# Altium PCB PCB.PcbDoc
Units mm, origin at the board's own origin, x right, y up, seen from the top; angles counter-clockwise.
Board outline 95.76 x 94.11 mm, 2 copper layers (Top Layer, Bottom Layer); 66 components, 57 nets, 327 pads, 35 vias.
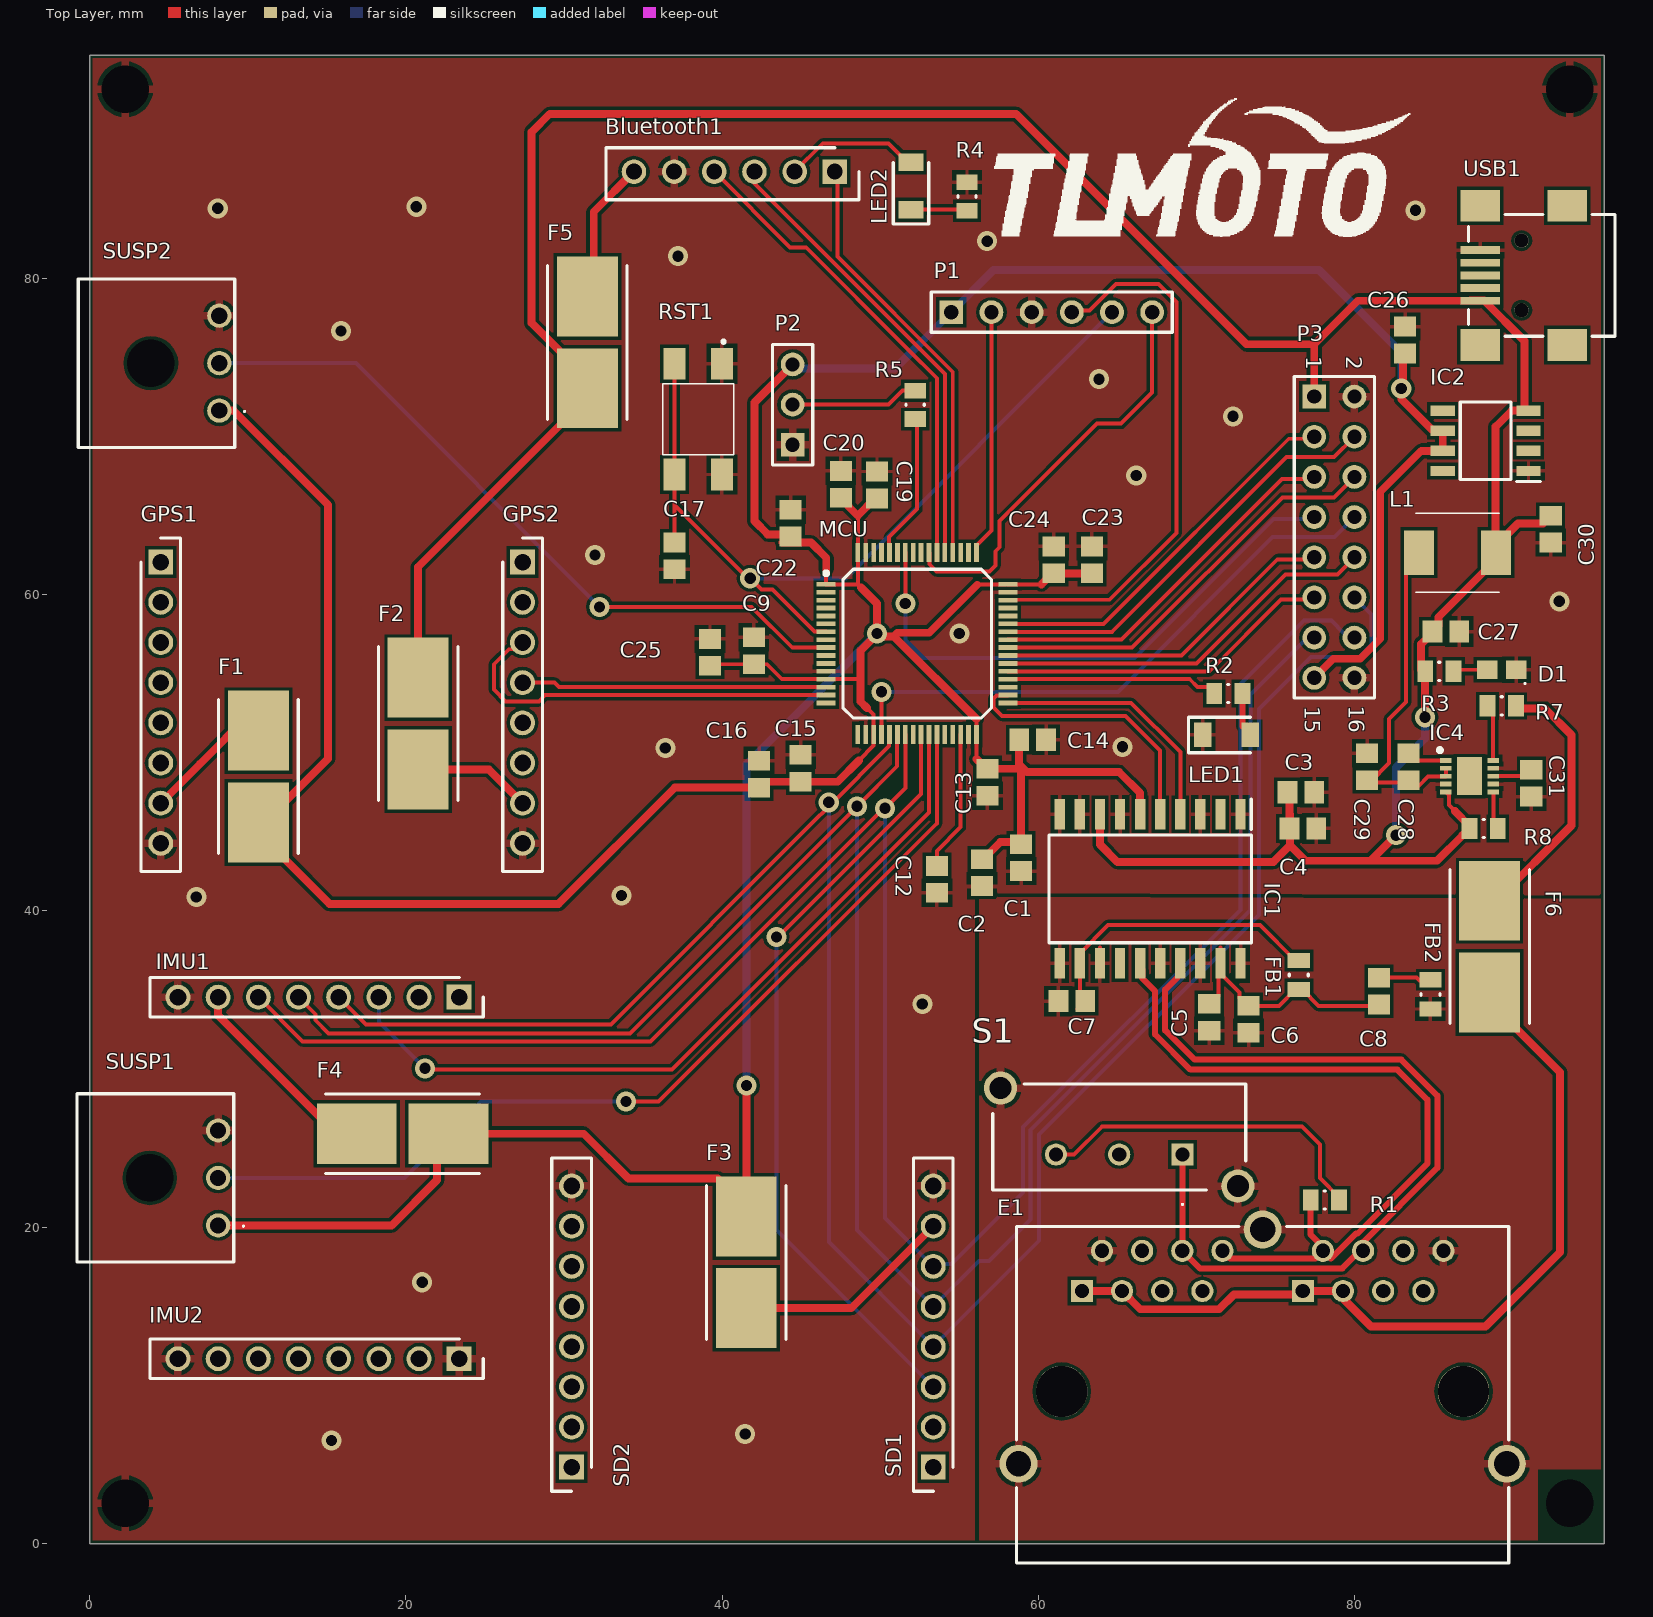
[diagram p0: Top Layer view]
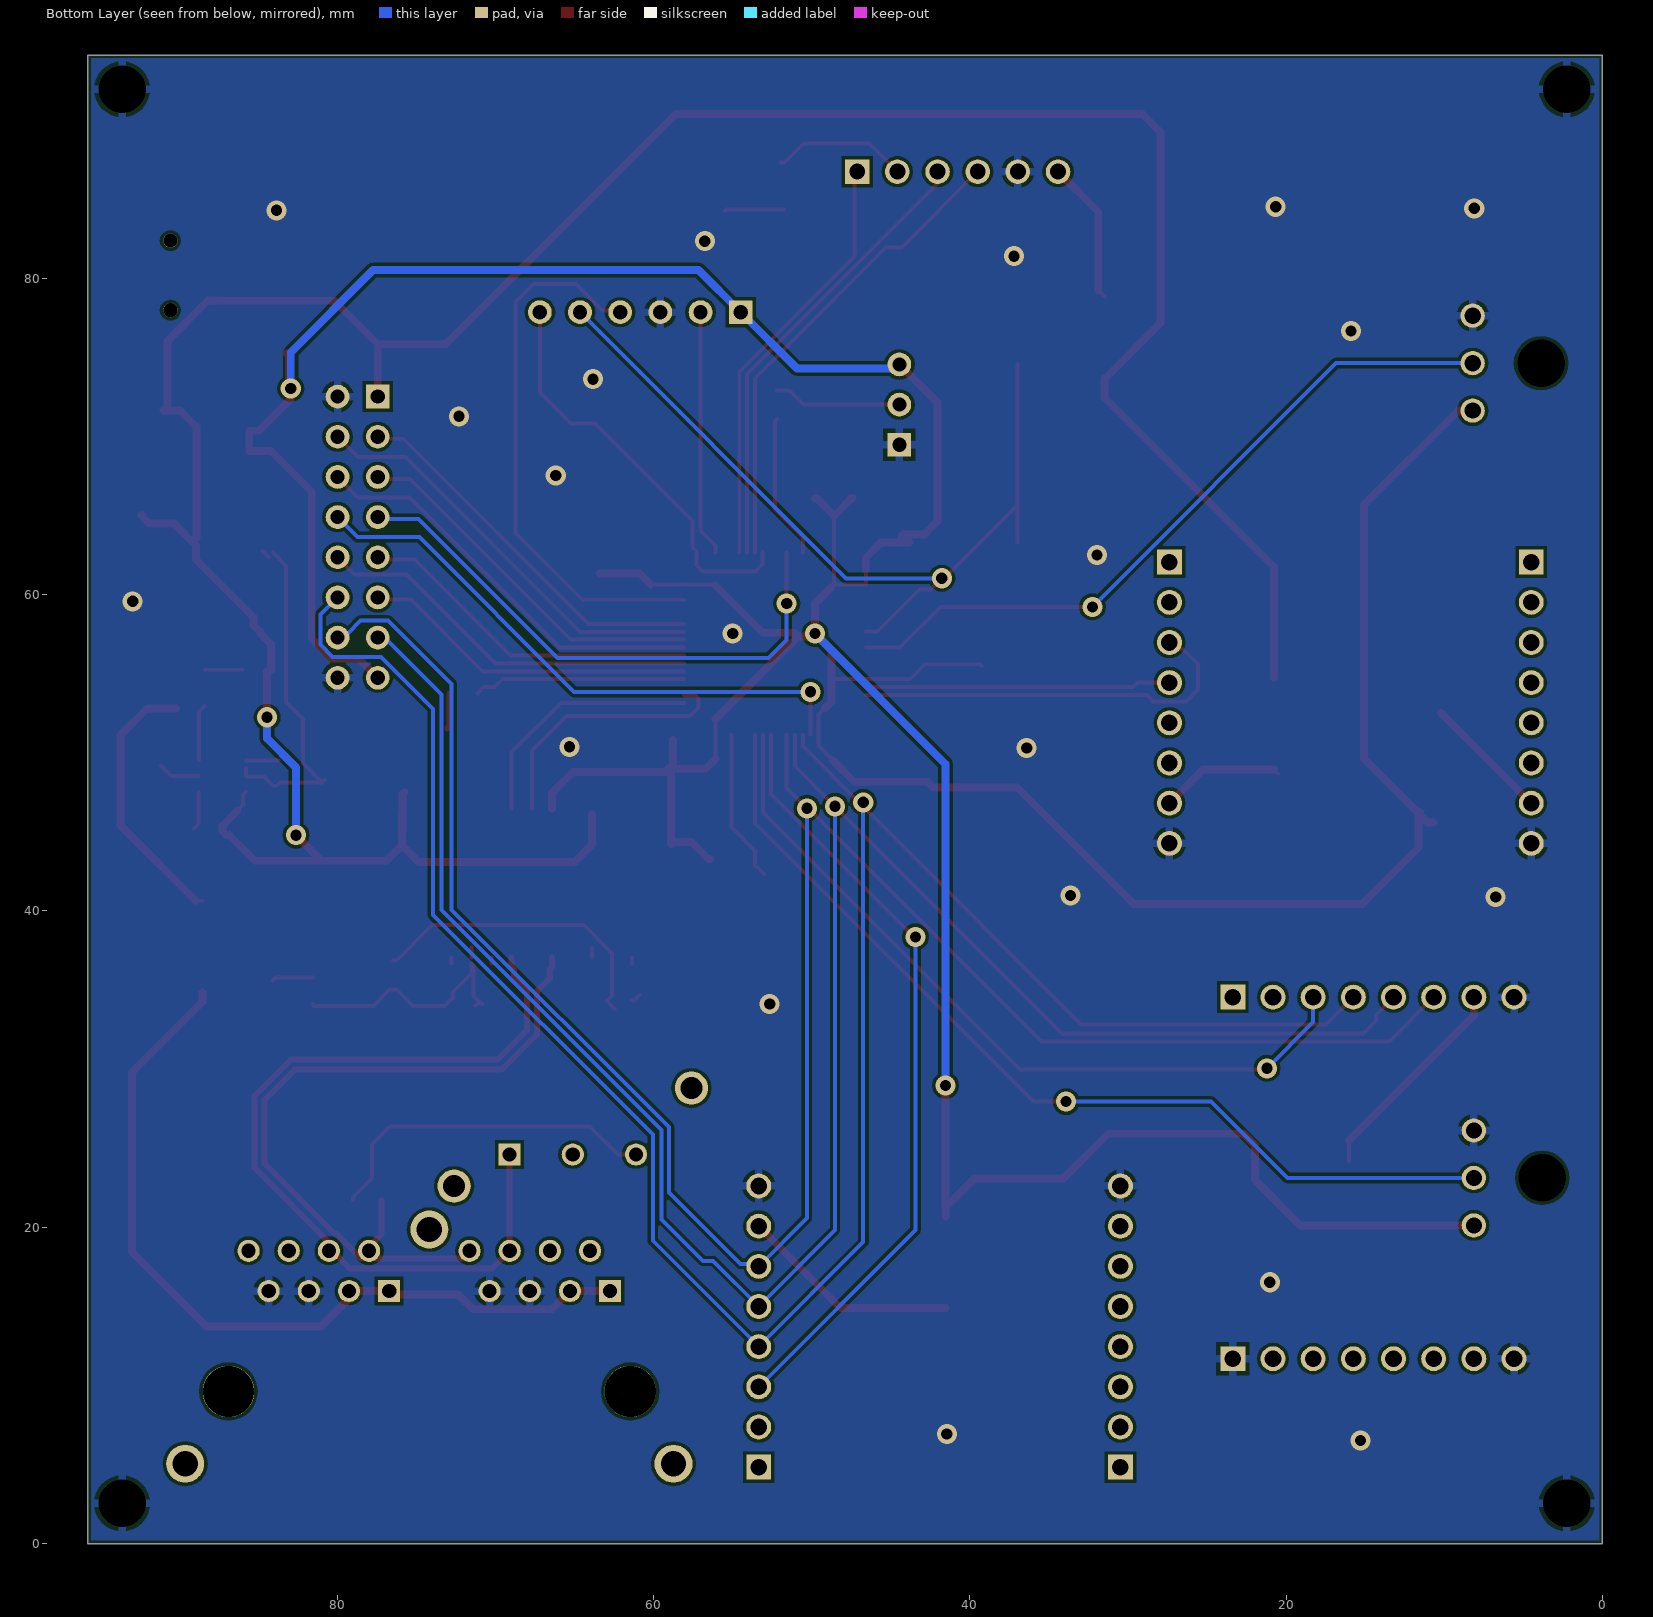
[diagram p1: Bottom Layer view, seen from below]

## Layer stack, top to bottom
Top Solder: solder mask 0.0102, Solder Resist, Dk 3.5
Top Layer: signal copper 0.0356
Dielectric 1: dielectric 0.32, FR-4, Dk 4.8
Bottom Layer: signal copper 0.0356
Bottom Solder: solder mask 0.0102, Solder Resist, Dk 3.5

## Board outline
95.758,0.006 95.758,94.113 0,94.113 0,0.006

## Design rules (kind name [scope] priority, off if disabled: settings)
BoardOutlineClearance [All] p1: gap=0.2 ignorepadtopadclearanceinfootprint=FALSE except(0.4: Arc-SplitBarrior Arc-SplitContinuation Track-SplitBarrior Track-SplitContinuation SMDPad-SplitBarrior SMDPad-SplitContinuation THPad-SplitBarrior THPad-SplitContinuation Via-SplitBarrior Via-SplitContinuation Fill-SplitBarrior Fill-SplitContinuation Poly-SplitBarrior Poly-SplitContinuation Region-SplitBarrior Region-SplitContinuation Text-SplitBarrior Text-SplitContinuation)
Clearance "Clearance Bottom Layer" [OnLayer('Bottom Layer')] p1: gap=0.203 ignorepadtopadclearanceinfootprint=TRUE except(0.254: Arc-Text Track-Text SMDPad-Text THPad-Text Via-Text Fill-Text Poly-Text Region-Text Text-Text)
Clearance "Clearance Top Layer" [OnLayer('Top Layer')] p2: gap=0.203 ignorepadtopadclearanceinfootprint=TRUE except(0.196: Arc-SMDPad Track-SMDPad; 0.254: Arc-Text Track-Text SMDPad-Text THPad-Text Via-Text Fill-Text Poly-Text Region-Text Text-Text)
Clearance [All] p3: gap=0.2 ignorepadtopadclearanceinfootprint=FALSE except(0.089: Arc-Arc Arc-Track Arc-SMDPad Track-Track Track-SMDPad SMDPad-SMDPad; 0.127: Arc-Via Track-Via SMDPad-Via THPad-Via Via-Via; 0.254: Arc-Text Track-Text SMDPad-Text THPad-Text Via-Text Fill-Text Poly-Text Region-Text Text-Text)
DiffPairsRouting [All] p1: maxlimit=0.254 minlimit=0.254 mostfreqgap=0.254 toplayer_minwidth=0.25 toplayer_maxwidth=0.381 toplayer_prefwidth=0.381 bottomlayer_minwidth=0.25 bottomlayer_maxwidth=0.381 bottomlayer_prefwidth=0.381 maxuncoupledlength=12.7
HoleSize [All] p1: absolutevalues=TRUE maxlimit=6.3 minlimit=0.2 maxpercent=80.000 minpercent=20.000
MinimumAnnularRing [All] p1: minimumring=0.076
MinimumSolderMaskSliver [All] p1: minsoldermaskwidth=0.1
PolygonConnect PolygonConnect_1 [All] p1: thpad.connectstyle=Relief thpad.reliefconductorwidth=0.508 thpad.reliefentries=4 thpad.polygonreliefangle="90 Angle" thpad.airgapwidth=0.254 smdpad.connectstyle=Relief smdpad.reliefconductorwidth=0.25 smdpad.reliefentries=4 smdpad.polygonreliefangle="90 Angle" smdpad.airgapwidth=0.254 via.connectstyle=Direct via.reliefconductorwidth=0.508 via.reliefentries=4 via.polygonreliefangle="90 Angle" via.airgapwidth=0.254
RoutingCorners [All] p1: cornerstyle=Round minsetback=2.54 maxsetback=2.54
RoutingVias [All] p1: holewidth=0.5 width=1 viastyle="Through Hole" minholewidth=0.2 minwidth=0.45 maxholewidth=1 maxwidth=2
SilkToSilkClearance [All] p1: silktosilkclearance=0.1
SilkToSolderMaskClearance [IsPad] p1: minsilkscreentomaskgap=0.1 clearancetoexposedcopper=TRUE
SolderMaskExpansion [All] p1: expansion=0.102
Width [All] p1: maxlimit=2.54 minlimit=0.089 preferedwidth=0.25 minimp=50.000000 maximp=50.000000 favimp=50.000000
24 further rules are at their usual default settings.

## Classes and differential pairs
component class "Supply_ (1)": C26 C27 C28 C29 C30 C31 D1 F6 IC2 IC4 R3 R7 R8
component class "MCU (2)": C9 C12 C13 C14 C15 C16 C17 C19 C20 C22 C23 C24 C25 LED1 MCU P1 P2 P3 R2 R5 RST1
component class Componentes: Bluetooth1 F2 F3 F4 F5 GPS1 GPS2 IMU1 IMU2 R4 SD1 SUSP1 SUSP2
component class CAN: C1 C2 C3 C4 C5 C6 C7 C8 FB1 FB2 IC1 R1
differential pair CAN: +CAN_P -CAN_N

## Components (designator, comment, footprint, x,y, rotation, side; value= is the part's Value field where it differs from the comment)
Bluetooth1 "61300611821" RHDR6W97P0X254_1X6_1574X250X865P 47.117,86.747 r180 top
C1 "10nF,+3.3V" "C 0805" 58.9,43.375 r90 top
C2 "100nF,+3.3V" "C 0805" 56.425,42.425 r90 top
C3 "100nF,+5V" "C 0805" 76.581,47.504 r180 top
C4 "10uF, +5V" "C 0805" 76.708,45.218 r180 top
C5 "10nF,+5V" "C 0805" 70.792,33.28 r90 top
C6 "100nF,+5V" "C 0805" 73.279,33.153 r90 top
C7 "100nF,+5V" "C 0805" 62.103,34.296 r0 top
C8 "10uF, +5V" "C 0805" 81.534,34.931 r270 top
C9 "Cap" "C 0805" 42,56.45 r90 top value=10nF
C12 "4.7uF" "C 0805" 53.575,42 r90 top
C13 "Cap" "C 0805" 56.769,48.139 r90 top value=1uF
C14 "Cap" "C 0805" 59.625,50.825 r180 top value=10nF
C15 "Cap" "C 0805" 44.958,49.02 r270 top value=1uF
C16 "Cap" "C 0805" 42.329,48.647 r270 top value=10nF
C17 "06035C104JAT2A" "C 0805" 36.981,62.45 r90 top
C19 "Cap" "C 0805" 47.498,66.974 r270 top value=10nF
C20 "Cap" "C 0805" 49.784,66.935 r270 top value=1uF
C22 "Cap" "C 0805" 44.323,64.522 r270 top value=1uF
C23 "Cap" "C 0805" 60.96,62.197 r270 top value=1uF
C24 "Cap" "C 0805" 63.373,62.202 r270 top value=10nF
C25 "Cap" "C 0805" 39.225,56.35 r90 top value=1uF
C26 "10uF" "C 0805" 83.175,76.1 r270 top
C27 "100nF, 25V" "C 0805" 85.749,57.664 r180 top
C28 "0.1uF, 25V" "C 0805" 83.387,49.116 r90 top
C29 "4.7pF, 25V" "C 0805" 80.772,49.116 r270 top
C30 "10uF,25V" "C 0805" 92.381,64.141 r270 top
C31 "2.2pF, 25V" "C 0805" 91.154,48.08 r90 top
D1 "Valor" "LED 0805" 89.281,55.251 r180 top
E1 "615016137621" Ethernet2 74.168,9.404 r0 top
F1 "015401.5DR" "Fuse Holder" 10.7,48.5 r90 top
F2 "015401.5DR" "Fuse Holder" 20.75,51.85 r270 top
F3 "015401.5DR" "Fuse Holder" 41.493,17.786 r270 top
F4 "015401.5DR" "Fuse Holder" 19.791,25.939 r180 top
F5 "015401.5DR" "Fuse Holder" 31.496,75.952 r90 top
F6 "015401.5DRT" "Fuse Holder" 88.494,37.746 r270 top
FB1 "1800Ohm, 1A" "F 0805" 76.454,35.947 r270 top
FB2 "1800Ohm, 1A" "F 0805" 84.775,34.725 r90 top
GPS1 "5-535541-6" RHDR8W60P0X254_1X8_2082X250X850P 4.5,62.055 r270 top
GPS2 "5-535541-6" RHDR8W60P0X254_1X8_2082X250X850P 27.375,62.055 r270 top
IC1 "ADM3053BRWZ" SOIC127P1032X265-20N 67.056,41.395 r270 top
IC2 "LD1117D33TR" SOIC127P600X175-8N 88.265,69.729 r180 top
IC4 "MAX16903SATB50_V+T" SON50P300X300X80-11N 87.249,48.52 r0 top
IMU1 "5-535541-6" RHDR8W60P0X254_1X8_2082X250X850P 23.368,34.55 r180 top
IMU2 "5-535541-6" RHDR8W60P0X254_1X8_2082X250X850P 23.368,11.69 r180 top
L1 "4.7uH" MPX1D0530L150 86.487,62.652 r180 top
LED1 "150120GS75000" LEDC3214X78N 71.882,51.127 r0 top
LED2 "150120GS75000" LEDC3214X78N 51.934,85.833 r90 top
MCU "STM32F446RET7" "Pins 1.2mm" 52.324,56.902 r0 top (schematic designator IC3)
P1 "Header 6" HDR1X6 54.483,77.857 r0 top
P2 "Header 3" HDR1X3 44.45,69.475 r90 top
P3 "Header 8X2" HDR2X8 77.431,72.523 r270 top
R1 "120R,+5V" "R 0805" 78.105,21.723 r0 top
R2 "LED3.3V" "R 0805" 72.003,53.754 r180 top
R3 "1k" "R 0805" 85.344,55.152 r0 top
R4 "LED3.3V" "R 0805" 55.475,85.175 r270 top
R5 "10K" "R 0805" 52.197,71.995 r90 top
R7 "33k" "R 0805" 89.281,52.965 r180 top
R8 "20k" "R 0805" 88.138,45.218 r0 top
RST1 "430181038816" 430181038816 38.481,71.095 r270 top
S1 "MSS1300R04" MHS12304 69.1,24.6 r0 top
SD1 "5-535541-6" RHDR8W60P0X254_1X8_2082X250X850P 53.34,4.832 r90 top
SD2 "5-535541-6" RHDR8W60P0X254_1X8_2082X250X850P 30.475,4.832 r90 top
SUSP1 "66200311022" 66200311022 8.13,20.12 r270 top
SUSP2 "66200311022" 66200311022 8.2,71.634 r270 top
USB1 "WE-Communication Connectors 651005136421" 65100516121 90.54,77.984 r90 top

## Footprints (in the part's own frame and the unit in brackets; to place one, negate y for a bottom-side part, rotate by r counter-clockwise, add the part's x,y. Pads: shape width x height; smd on the part's side, far side on the other; paste and mask are expansions set on the pad)
65100516121 [mm]
  rect 0.5x2.5 smd: 1(0.6,2.6) 2(1.4,2.6) 3(2.2,2.6) 4(3,2.6) 5(3.8,2.6)
  rect 2x2.5 smd: ""(-2.2,-2.9) ""(-2.2,2.6) ""(6.6,-2.9) ""(6.6,2.6)
  round 0.9 hole 0.9 unplated: ""(0,0) ""(4.4,0)
  silkscreen extent -1.65,-5.9 6.05,3.35, body extent -2.6,-5.9 7,3.35, height 3.92
66200311022 [mm]
  round 1.53 hole 1.02: 1(0,0) 2(-3,0) 3(-6,0)
  round 1.5 hole 3 unplated: MH1(-3,-4.32)
  silkscreen extent -8.32,-8.92 2.32,1.65, body extent -8.32,-8.92 2.32,0.98, height 5.82
430181038816 [mm]
  rect 2x1.4 smd: 1(-3.5,1.5) 2(3.5,1.5) 3(-3.5,-1.5) 4(3.5,-1.5)
  silkscreen extent -5,-2.25 2.25,2.25
"C 0805" [mm] "Chip Capacitor, 2-Leads, Body 2,00x1,25mm, IPC Medium Density"
  rect 1.25x1.4 smd: 1(-0.85,0) 2(0.85,0)
  body extent -1.08,-0.67 1.07,0.67, height 0.9
Ethernet2 [mm]
  rect 1.4x1.4 hole 0.9: A1(-11.43,6.565) B1(2.54,6.565)
  round 1.4 hole 0.9: A2(-10.16,9.105) A3(-8.89,6.565) A4(-7.62,9.105) A5(-6.35,6.565) A6(-5.08,9.105) A7(-3.81,6.565) A8(-2.54,9.105) B2(3.81,9.105) B3(5.08,6.565) B4(6.35,9.105) B5(7.62,6.565) B6(8.89,9.105) B7(10.16,6.565) B8(11.43,9.105)
  round 3.25 hole 3.25 unplated: MH1(-12.7,0.215) MH2(12.7,0.215)
  round 2.4 hole 1.6: S1(-15.435,-4.355) S2(15.435,-4.355) S3(0,10.455)
  silkscreen extent -15.56,-10.64 15.56,10.63, body extent -15.57,-10.64 15.56,10.63, height 13.75
"F 0805" [mm] "Chip Resistor, 2-Leads, Body 2,00x1,25mm, IPC Medium Density"
  rect 0.95x1.4 smd: 1(-0.925,0) 2(0.925,0)
  silkscreen extent -0.05,-0.6 0.05,0.6, body extent -1.05,-0.7 1.05,0.7, height 0.55
"Fuse Holder" [mm]
  rect 5.05x3.85 smd: 1(-2.9,0.025) 2(2.9,0.025)
  silkscreen extent -4.86,-2.49 4.87,2.54, body extent -4.86,-2.51 4.87,2.52, height 3.82
HDR1X3 [mm] "Connector; Header; 3 Position"
  rect 1.5x1.5 hole 0.9: 1(0,0)
  round 1.5 hole 0.9: 2(2.54,0) 3(5.08,0)
  silkscreen extent -1.27,-1.27 6.35,1.27
HDR1X6 [mm] "Connector; Header; 6 Position"
  rect 1.5x1.5 hole 0.9: 1(0,0)
  round 1.5 hole 0.9: 2(2.54,0) 3(5.08,0) 4(7.62,0) 5(10.16,0) 6(12.7,0)
  silkscreen extent -1.27,-1.27 13.97,1.27
HDR2X8 [mm] "Connector; Header; 8x2 Position"
  rect 1.5x1.5 hole 0.9: 1(0,0)
  round 1.5 hole 0.9: 2(0,2.54) 3(2.54,0) 4(2.54,2.54) 5(5.08,0) 6(5.08,2.54) 7(7.62,0) 8(7.62,2.54) 9(10.16,0) 10(10.16,2.54) 11(12.7,0) 12(12.7,2.54) 13(15.24,0) 14(15.24,2.54) 15(17.78,0) 16(17.78,2.54)
  silkscreen extent -1.27,-1.27 19.05,3.81
"LED 0805" [mm] "Molded Diode, 2-Leads, Body 2,00x1,25mm, IPC Medium Density"
  rect 1.3x1.15 smd: 1(-0.925,0) 2(0.925,0)
  silkscreen extent -1.52,0.83 -1.43,0.92, body extent -1.05,-0.67 1.05,0.67, height 1.1
LEDC3214X78N [mm]
  rect 1.1x1.55 smd: 1(-1.5,0) 2(1.5,0)
  silkscreen extent -2.4,-1.12 1.5,1.12, body extent -1.6,-0.8 1.6,0.8, height 0.68
MHS12304 [mm]
  rect 1.4x1.4 hole 0.9: 1(0,0)
  round 1.4 hole 0.9: 2(-4,0) 3(-8,0)
  round 2.1 hole 1.4: MH1(3.5,-2) MH2(-11.5,4.2)
  silkscreen extent -12,-3.2 4,4.45, body extent -12.1,-2.6 4.1,4.8, height 12.4
MPX1D0530L150 [mm]
  rect 1.905x2.79 smd: 1(-2.425,0) 2(2.425,0)
  silkscreen extent -2.65,-2.5 2.65,2.5, body extent -3.19,-2.5 3.19,2.5, height 3.1
"Pins 1.2mm" [mm] "CQFP, 64-Leads, Body 12,00x12,00mm, Pitch 0,50mm, IPC Medium Density"
  rect 1.2x0.3 smd: 1(-5.75,3.75) 2(-5.75,3.25) 3(-5.75,2.75) 4(-5.75,2.25) 5(-5.75,1.75) 6(-5.75,1.25) 7(-5.75,0.75) 8(-5.75,0.25) 9(-5.75,-0.25) 10(-5.75,-0.75) 11(-5.75,-1.25) 12(-5.75,-1.75) 13(-5.75,-2.25) 14(-5.75,-2.75) 15(-5.75,-3.25) 16(-5.75,-3.75) 33(5.75,-3.75) 34(5.75,-3.25) 35(5.75,-2.75) 36(5.75,-2.25) 37(5.75,-1.75) 38(5.75,-1.25) 39(5.75,-0.75) 40(5.75,-0.25) 41(5.75,0.25) 42(5.75,0.75) 43(5.75,1.25) 44(5.75,1.75) 45(5.75,2.25) 46(5.75,2.75) 47(5.75,3.25) 48(5.75,3.75)
  rect 0.3x1.2 smd: 17(-3.75,-5.75) 18(-3.25,-5.75) 19(-2.75,-5.75) 20(-2.25,-5.75) 21(-1.75,-5.75) 22(-1.25,-5.75) 23(-0.75,-5.75) 24(-0.25,-5.75) 25(0.25,-5.75) 26(0.75,-5.75) 27(1.25,-5.75) 28(1.75,-5.75) 29(2.25,-5.75) 30(2.75,-5.75) 31(3.25,-5.75) 32(3.75,-5.75) 49(3.75,5.75) 50(3.25,5.75) 51(2.75,5.75) 52(2.25,5.75) 53(1.75,5.75) 54(1.25,5.75) 55(0.75,5.75) 56(0.25,5.75) 57(-0.25,5.75) 58(-0.75,5.75) 59(-1.25,5.75) 60(-1.75,5.75) 61(-2.25,5.75) 62(-2.75,5.75) 63(-3.25,5.75) 64(-3.75,5.75)
  silkscreen extent -5.87,-4.7 4.7,4.7, body extent -5,-5 5,5, height 1.6
"R 0805" [mm] "Chip Resistor, 2-Leads, Body 2,00x1,25mm, IPC Medium Density"
  rect 1x1.35 smd: 1(-0.9,0) 2(0.9,0)
  silkscreen extent -0.05,-0.58 0.05,0.58, body extent -1.05,-0.67 1.05,0.67, height 0.6
RHDR6W97P0X254_1X6_1574X250X865P [mm]
  rect 1.55x1.55 hole 1: 1(0,0)
  round 1.55 hole 1: 2(2.54,0) 3(5.08,0) 4(7.62,0) 5(10.16,0) 6(12.7,0)
  silkscreen extent -1.52,-1.51 14.47,1.78, body extent -1.52,-1.25 14.22,1.25, height 8.65
RHDR8W60P0X254_1X8_2082X250X850P [mm]
  rect 1.575x1.575 hole 1.05: 1(0,0)
  round 1.575 hole 1.05: 2(2.54,0) 3(5.08,0) 4(7.62,0) 5(10.16,0) 6(12.7,0) 7(15.24,0) 8(17.78,0)
  silkscreen extent -1.52,-1.25 19.55,1.25, body extent -1.52,-1.25 19.3,1.25, height 8.5
SOIC127P600X175-8N [mm]
  rect 1.525x0.65 smd: 1(-2.712,1.905) 2(-2.712,0.635) 3(-2.712,-0.635) 4(-2.712,-1.905) 5(2.712,-1.905) 6(2.712,-0.635) 7(2.712,0.635) 8(2.712,1.905)
  silkscreen extent -3.47,-2.45 1.6,2.58, body extent -3,-2.45 3,2.45, height 1.75
SOIC127P1032X265-20N [mm]
  rect 1.925x0.65 smd: 1(-4.712,5.715) 2(-4.712,4.445) 3(-4.712,3.175) 4(-4.712,1.905) 5(-4.712,0.635) 6(-4.712,-0.635) 7(-4.712,-1.905) 8(-4.712,-3.175) 9(-4.712,-4.445) 10(-4.712,-5.715) 11(4.712,-5.715) 12(4.712,-4.445) 13(4.712,-3.175) 14(4.712,-1.905) 15(4.712,-0.635) 16(4.712,0.635) 17(4.712,1.905) 18(4.712,3.175) 19(4.712,4.445) 20(4.712,5.715)
  silkscreen extent -5.68,-6.4 3.4,6.4, body extent -5.16,-6.4 5.16,6.4, height 2.65
SON50P300X300X80-11N [mm]
  rect 0.75x0.3 smd: 1(-1.5,1) 2(-1.5,0.5) 3(-1.5,0) 4(-1.5,-0.5) 5(-1.5,-1) 6(1.5,-1) 7(1.5,-0.5) 8(1.5,0) 9(1.5,0.5) 10(1.5,1)
  rect 1.6x2.4 smd: 11(0,0)
  silkscreen extent -2,1.53 -1.75,1.77, body extent -1.55,-1.5 1.55,1.5, height 0.8

## Part data
Bluetooth1: "Connector", Manufacturer_Name="Wurth Elektronik", Mouser Part Number=710-61300611821, Datasheet Link=https://www.we-online.de/katalog/datasheet/61300611821.pdf, Height=8.65mm, Manufacturer_Part_Number=61300611821, Mouser Price/Stock=https://www.mouser.co.uk/ProductDetail/Wurth-Elektronik/61300611821?qs=iLbezkQI%252BsgS21jF2eozhA%3D%3D
C1 C5: library part 885012207126_6, "WCAP-CSGP Multilayer Ceramic Chip Capacitor, General Purpose, size 0805, X7R, 47nF, 100V", Capacitance=47nF, Capacitance Tolerance=+/-10%, Isolation Resistance=>=2.1GOhm, Manufacturer="Wurth Elektronik", Manufacturer Part Number=885012207126, Operating Temperature="-55 to +125degC", Rated Voltage=100VDC, Ceramic Type=X7R, ComponentLink1Description=Manufacturer, ComponentLink1URL=http://www.we-online.de, ComponentLink2Description=Datasheet, ComponentLink2URL=https://www.we-online.com/catalog/datasheet/885012207126.pdf, Dissipation Factor=#NAME?, Height=1.25mm, Mounting Technology=SMT, Packaging="Tape and Reel", Published Date="May 2020", Size=0805, Technical Reference=X7R0805473K100DFCT10000
C2: library part 885012208015_1, "WCAP-CSGP General Purpose Ceramic Capacitors, size 1206, 2.2uF, +/-10%, 10VDC", Capacitance=2.2uF, Capacitance Tolerance=+/-10%, Isolation Resistance=>=0.2GOhm, Operating Temperature="-55 to +125degC", Part Number=885012208015, Rated Voltage=10VDC, Ceramic Type=X7R, ComponentLink1Description=Manufacturer, ComponentLink1URL=http://www.we-online.de, ComponentLink2Description=Datasheet, ComponentLink2URL=https://katalog.we-online.com/pbs/datasheet/885012208015.pdf, Dissipation Factor=#NAME?, Height="1.15mm +/-0.15mm", Mounting Technology=SMT, Packaging="Tape and Reel", Published Date="August 2019", Publisher="Wurth Elektronik", Size=1206, Technical Reference=X7R1206225K010DFCT10000
C3 C6 C7: library part 885012208013_4, "WCAP-CSGP General Purpose Ceramic Capacitors, size 1206, 1uF, +/-10%, 10VDC", Capacitance=1uF, Capacitance Tolerance=+/-10%, Isolation Resistance=>=0.5GOhm, Operating Temperature="-55 to +125degC", Part Number=885012208013, Rated Voltage=10VDC, Ceramic Type=X7R, ComponentLink1Description=Manufacturer, ComponentLink1URL=http://www.we-online.de, ComponentLink2Description=Datasheet, ComponentLink2URL=https://katalog.we-online.com/pbs/datasheet/885012208013.pdf, Dissipation Factor=#NAME?, Height="1.15mm +/-0.15mm", Mounting Technology=SMT, Packaging="Tape and Reel", Published Date="August 2019", Publisher="Wurth Elektronik", Size=1206, Technical Reference=X7R1206105K010DFCT10000
C4 C8: library part 885012208013_5, "WCAP-CSGP General Purpose Ceramic Capacitors, size 1206, 1uF, +/-10%, 10VDC", Capacitance=1uF, Capacitance Tolerance=+/-10%, Isolation Resistance=>=0.5GOhm, Operating Temperature="-55 to +125degC", Part Number=885012208013, Rated Voltage=10VDC, Ceramic Type=X7R, ComponentLink1Description=Manufacturer, ComponentLink1URL=http://www.we-online.de, ComponentLink2Description=Datasheet, ComponentLink2URL=https://katalog.we-online.com/pbs/datasheet/885012208013.pdf, Dissipation Factor=#NAME?, Height="1.15mm +/-0.15mm", Mounting Technology=SMT, Packaging="Tape and Reel", Published Date="August 2019", Publisher="Wurth Elektronik", Size=1206, Technical Reference=X7R1206105K010DFCT10000
C9 C13 C14 C15 C16 C19 C20 C22 C23 C24 C25: "Capacitor", LatestRevisionDate=17-Jul-2002, LatestRevisionNote="Re-released for DXP Platform.", PackageDescription="Radial Cap, Thru-Hole; 2 Leads; 0.3 in Pin Spacing", PackageReference=RAD-0.3, Published=8-Jun-2000, Publisher="Altium Limited"
C12: library part 885012208013, "WCAP-CSGP Multilayer Ceramic Chip Capacitor, General Purpose, size 1206, X7R, 1uF, 10V", Capacitance=1uF, Capacitance Tolerance=+/-10%, Isolation Resistance=>=0.5GOhm, Manufacturer="Wurth Elektronik", Operating Temperature="-55 to +125degC", Rated Voltage=10VDC, Ceramic Type=X7R, ComponentLink1Description=Manufacturer, ComponentLink1URL=http://www.we-online.de, ComponentLink2Description=Datasheet, ComponentLink2URL=https://www.we-online.com/catalog/datasheet/885012208013.pdf, Dissipation Factor=#NAME?, Height=1.15mm, Manufacturer Part Number=885012208013, Mounting Technology=SMT, Packaging="Tape and Reel", Published Date="May 2020", Size=1206, Technical Reference=X7R1206105K010DFCT10000
C17: "Capacitor,100nf,+3.3V,1206", Manufacturer_Name=AVX, Mouser Part Number=581-06035C104JAT2A, Arrow Part Number=06035C104JAT2A, Arrow Price/Stock=https://www.arrow.com/en/products/06035c104jat2a/avx, Datasheet Link=http://www.mouser.com/catalog/supplier/library/pdf/AVXSurfaceMountCeramic.pdf, Height=0.9mm, Manufacturer_Part_Number=06035C104JAT2A, Mouser Price/Stock=https://www.mouser.co.uk/ProductDetail/AVX/06035C104JAT2A/?qs=EbDiPP9peV%252BVb%2FIEcsjONQ%3D%3D
C26 C27 C28 C29 C30 C31: library part Condensador, "Condensador"
D1: library part LED, "LED"
E1: "WR-MJ Modular Jack THT Horizontal Shielded Dual Port 8P8C Tab Down", Contact Resistance=20mOhm, Insulation Resistance=500MOhm, Operating Temperature="-40 to +85degC", Rated Current=1.5A, Withstanding Voltage=1000VAC, Working Voltage=120VAC, ComponentLink1Description=Manufacturer, ComponentLink1URL=http://www.we-online.de, ComponentLink2Description=Datasheet, ComponentLink2URL=https://katalog.we-online.com/em/datasheet/615016137621.pdf, Mounting Technology=THT, Packaging=Tray, Part Number=615016137621, Published Date="November 2019", Publisher="Wurth Elektronik", Type=Horizontal, xPxC=8P8C
F1 F2 F3 F4 F5: "Fuse", Manufacturer_Name=LITTELFUSE, Mouser Part Number=576-015401.5DR, RS Part Number=7382879P, Allied_Number=70519132, Allied Price/Stock=https://www.alliedelec.com/littelfuse-015401-5dr/70519132/, Datasheet Link=https://www.littelfuse.com/~/media/electronics/datasheets/fuses/littelfuse_fuse_154_154t_154l_154tl_datasheet.pdf.pdf, Height=3.81mm, Manufacturer_Part_Number=015401.5DR, Mouser Price/Stock=https://www.mouser.com/Search/Refine.aspx?Keyword=576-015401.5DR, RS Price/Stock=http://uk.rs-online.com/web/p/products/7382879P
F6: "Fuse", Manufacturer_Name=LITTELFUSE, Mouser Part Number=576-015401.5DRT, Arrow Part Number=015401.5DRT, Arrow Price/Stock=https://www.arrow.com/en/products/015401.5drt/littelfuse?region=nac, Datasheet Link=https://componentsearchengine.com/Datasheets/2/015401.5DRT.pdf, Height=3.81mm, Manufacturer_Part_Number=015401.5DRT, Mouser Price/Stock=https://www.mouser.co.uk/ProductDetail/Littelfuse/015401.5DRT?qs=gu7KAQ731USSn8iq6YrVPw%3D%3D
FB1 FB2: library part 742792090, "WE-CBF SMT EMI Suppression Ferrite Bead, size 0805, 1800Ohm, 1A", DC Resistance max.=0.4Ohm, Manufacturer="Wurth Elektronik", Operating Temperature="-55 to +125degC", Rated Current=1A, ComponentLink1Description=Manufacturer, ComponentLink1URL=http://www.we-online.de, ComponentLink2Description=Datasheet, ComponentLink2URL=https://www.we-online.com/catalog/datasheet/742792090.pdf, Impedance @100MHz=1800Ohm, Impedance max.=2000Ohm, Manufacturer Part Number=742792090, Mounting Technology=SMT, Packaging="Tape and Reel", Published Date="March 2020", Size=0805, Type="Wide Band"
GPS1 GPS2 IMU1 IMU2 SD1 SD2: "Connector Socket Strip RCP 8 POS 2.54mm Solder ST Thru-Hole Gang of Tubes", Package=None, Availability=Unavailable, MF="TE Connectivity", MP=5-535541-6, Price=None, SnapEDA_Link=https://www.snapeda.com/parts/5-535541-6/TE%20Connectivity%20AMP%20Connectors/view-part/497141/?ref=snap
IC1: "Integrated Circuit", Manufacturer_Name="Analog Devices", Mouser Part Number=584-ADM3053BRWZ, Arrow Part Number=ADM3053BRWZ, Arrow Price/Stock=https://www.arrow.com/en/products/adm3053brwz/analog-devices?region=nac, Datasheet Link=https://componentsearchengine.com/Datasheets/2/ADM3053BRWZ.pdf, Height=2.65mm, Manufacturer_Part_Number=ADM3053BRWZ, Mouser Price/Stock=https://www.mouser.co.uk/ProductDetail/Analog-Devices/ADM3053BRWZ?qs=BpaRKvA4VqGZYG1hZ9cdqw%3D%3D
IC2: "Integrated Circuit", Manufacturer_Name=STMicroelectronics, Mouser Part Number=511-LD1117D33-TR, Arrow Part Number=LD1117D33TR, Arrow Price/Stock=https://www.arrow.com/en/products/ld1117d33tr/stmicroelectronics, Datasheet Link=http://www.st.com/st-web-ui/static/active/en/resource/technical/document/datasheet/CD00000544.pdf, Height=1.75mm, Manufacturer_Part_Number=LD1117D33TR, Mouser Price/Stock=https://www.mouser.co.uk/ProductDetail/STMicroelectronics/LD1117D33TR?qs=8YYpzd7qSxIl%2FiC6F%2FA2nA%3D%3D
IC4: "Integrated Circuit", Manufacturer_Name="Maxim Integrated", Manufacturer_Part_Number=MAX16903SATB50/V+T, Datasheet Link=https://pdfserv.maximintegrated.com/en/ds/MAX16903.pdf, Height=0.8mm
L1: library part Inductor, "Inductor"
LED1 LED2: "LED", Manufacturer_Name="Wurth Elektronik", Mouser Part Number=710-150120GS75000, Height=0.78mm, Manufacturer_Part_Number=150120GS75000, Mouser Price/Stock=https://www.mouser.co.uk/ProductDetail/Wurth-Elektronik/150120GS75000?qs=LlUlMxKIyB3I3AMxrmBw4A%3D%3D
MCU: "Integrated Circuit", Manufacturer_Name=STMicroelectronics, Mouser Part Number=511-STM32F446RET7, Arrow Part Number=STM32F446RET7, Arrow Price/Stock=https://www.arrow.com/en/products/stm32f446ret7/stmicroelectronics?region=nac, Datasheet Link=https://componentsearchengine.com/Datasheets/5/STM32F446RET7.pdf, Height=1.6mm, Manufacturer_Part_Number=STM32F446RET7, Mouser Price/Stock=https://www.mouser.co.uk/ProductDetail/STMicroelectronics/STM32F446RET7?qs=qzCNEk%252BRr%252BZ3vIhuSM4Ejg%3D%3D
P1: "Header, 6-Pin", LatestRevisionDate=17-Jul-2002, LatestRevisionNote="Re-released for DXP Platform.", Publisher="Altium Limited"
P2: "Header, 3-Pin", LatestRevisionDate=17-Jul-2002, LatestRevisionNote="Re-released for DXP Platform.", Publisher="Altium Limited"
P3: "Header, 8-Pin, Dual row", LatestRevisionDate=17-Jul-2002, LatestRevisionNote="Re-released for DXP Platform.", Publisher="Altium Limited"
R1: library part 560050320011_9, "WRIS-KSKE SMT Thick Film Resistor, size 0805, 1Ohm, 0.33W", Manufacturer="Wurth Elektronik", Manufacturer Part Number=560050320011, Operating Temperature="-55 to +155degC", Rated Current=0.57A, Rated Power=0.33W, Resistance=1Ohm, Resistance Tolerance=+/-1%, Temperature Coefficient of Resistance=+/-100ppm/degC, ComponentLink1Description=Manufacturer, ComponentLink1URL=http://www.we-online.de, ComponentLink2Description=Datasheet, ComponentLink2URL=https://www.we-online.com/catalog/datasheet/560050320011.pdf, Height=0.6mm, Length=2mm, Mounting Technology=SMT, Packaging="Tape and Reel", Published Date="May 2020", Size=0805, Technical Reference=KE08051R00F103KAATP0000, Width=1.25mm
R2 R5: library part 560050320011, "WRIS-KSKE SMT Thick Film Resistor, size 0805, 1Ohm, 0.33W", Manufacturer="Wurth Elektronik", Operating Temperature="-55 to +155degC", Rated Current=0.57A, Rated Power=0.33W, Resistance=1Ohm, Resistance Tolerance=+/-1%, Temperature Coefficient of Resistance=+/-100ppm/degC, ComponentLink1Description=Manufacturer, ComponentLink1URL=http://www.we-online.de, ComponentLink2Description=Datasheet, ComponentLink2URL=https://www.we-online.com/catalog/datasheet/560050320011.pdf, Height=0.6mm, Length=2mm, Manufacturer Part Number=560050320011, Mounting Technology=SMT, Packaging="Tape and Reel", Published Date="May 2020", Size=0805, Technical Reference=KE08051R00F103KAATP0000, Width=1.25mm
R3 R7 R8: library part Resistencia, "Resistencia"
R4: library part 560050320011_2, "WRIS-KSKE SMT Thick Film Resistor, size 0805, 1Ohm, 0.33W", Manufacturer="Wurth Elektronik", Manufacturer Part Number=560050320011, Operating Temperature="-55 to +155degC", Rated Current=0.57A, Rated Power=0.33W, Resistance=1Ohm, Resistance Tolerance=+/-1%, Temperature Coefficient of Resistance=+/-100ppm/degC, ComponentLink1Description=Manufacturer, ComponentLink1URL=http://www.we-online.de, ComponentLink2Description=Datasheet, ComponentLink2URL=https://www.we-online.com/catalog/datasheet/560050320011.pdf, Height=0.6mm, Length=2mm, Mounting Technology=SMT, Packaging="Tape and Reel", Published Date="May 2020", Size=0805, Technical Reference=KE08051R00F103KAATP0000, Width=1.25mm
RST1: "WS-TASV SMT Tact Switch 4.5x4.5mm, height 3.8mm, 160gf", Operating Temperature="-40 to +85degC", Rated Current=50mA, Rated Voltage=12VDC, ComponentLink1Description=Manufacturer, ComponentLink1URL=http://www.we-online.de, ComponentLink2Description=Datasheet, ComponentLink2URL=https://katalog.we-online.com/em/datasheet/430181038816.pdf, Contact Material="Stainless Steel", Contact Plating=Silver, Height=3.8mm, Mounting Technology=SMT, Operation Force=160gf, Packaging="Tape and Reel", Part Number=430181038816, Published Date="September 2019", Publisher="Wurth Elektronik", Terminal Material="Copper Alloy", Terminal Plating=Silver, Washable=No
S1: library part MHS12304, "Switch", Manufacturer_Name="TE Connectivity", Mouser Part Number=506-MHS12304, Datasheet Link=https://www.te.com/commerce/DocumentDelivery/DDEController?Action=showdoc&DocId=Customer+Drawing%7F1825255%7FB2%7Fpdf%7FEnglish%7FENG_CD_1825255_B2.pdf%7F1825255-5, Height=12.3mm, Manufacturer_Part_Number=MHS12304, Mouser Price/Stock=https://www.mouser.co.uk/ProductDetail/TE-Connectivity-PB/MHS12304?qs=x%2FgbKjZ2T%2FMAxqlZIkgJKQ%3D%3D
SUSP1 SUSP2: "Connector", Manufacturer_Name="Wurth Elektronik", Mouser Part Number=710-66200311022, Datasheet Link=https://docs.rs-online.com/3e1f/A700000007269589.pdf, Height=5.72mm, Manufacturer_Part_Number=66200311022, Mouser Price/Stock=https://www.mouser.co.uk/ProductDetail/Wurth-Elektronik/66200311022?qs=3RJ0PdSuLVkSi7ZZT4Z8xA%3D%3D
USB1: "WR-COM Mini USB Vertical TH Type B 5 Contacts", Manufacturer="Würth Elektronik eiSos GmbH", partNo=651005136421, ComponentLink1 Description=Manufacturer, ComponentLink1URL=http://www.we-online.de, ComponentLink2 Description=Datasheet, ComponentLink2URL=http://katalog.we-online.de/em/datasheet/651005136421.pdf, Created by="Karrer Zheng", Created Date=10/10/2014, NoPins=5

## Free pads (board coordinates)
  round 1.524 hole 3: 3(2.25,2.546) 3(2.25,91.95) 3(93.599,2.546) 3(93.599,91.95)

## Via types
v1: diameter 1.27, hole 0.711, Top Layer to Bottom Layer, 35 vias

## Nets (pads, with @x,y where several pads share a name; then routed paths per layer and width w, separated by ;. In a path a pad name is that pad's centre, name@x,y a point inside that pad or via, vN(x,y) a via of type N, cw(c..) or ccw(c..) an arc to the next point about the centre after c; other vN are vias at no path point)
+24V: E1.A1 E1.A3 E1.B1 E1.B3 F6.2 | length 52.4
  Top Layer w0.5: E1.A1 E1.A3 66.431,14.816 71.411,14.816 72.349,15.754 76.493,15.754 E1.B1 ; E1.B1@76.923,15.969 E1.B3 79.248,15.5 81.026,13.722 88.265,13.722 92.964,18.421 92.964,29.801 88.519,34.246 F6.2
B3_RX: Bluetooth1.3 MCU.53 | length 29.1
  Top Layer w0.25: Bluetooth1.3 42.037,85.985 54.074,73.948 MCU.53
B3_TX: Bluetooth1.4 MCU.54 | length 30.5
  Top Layer w0.25: Bluetooth1.4 44.294,81.95 45.31,81.95 51.689,75.571 51.689,75.568 53.574,73.683 MCU.54
"BOOT SEL": P2.2 R5.2 | length 7.9
  Top Layer w0.25: P2.2@44.704,72.015 50.498,72.015 51.387,72.904 52.188,72.904 R5.2
"CAN Rx": IC1.4 MCU.33 | length 15.7
  Top Layer w0.25: MCU.33 65.848,53.152 68.961,50.039 IC1.4@68.961,46.488
"CAN Tx": IC1.5 MCU.34 | length 16.9
  Top Layer w0.25: MCU.34 58.049,53.627 57.345,53.627 57.15,53.432 57.15,52.872 57.692,52.33 65.495,52.33 67.691,50.134 IC1.5@67.691,46.488
CAN_N: E1.A8 E1.B2 IC1.15 R1.1 | length 47.8
  Top Layer w0.381: IC1.15@66.421,37.064 IC1.15 66.421,36.427 66.556,36.292 66.556,35.749 67.373,34.931 67.373,32.191 69.6,29.965 82.681,29.965 84.582,28.064 84.582,27.901 84.576,27.895 84.576,26.169 84.582,26.163 84.582,24.018 80.167,19.603 80.065,19.603 78.502,18.04 78.447,18.04 E1.B2 ; E1.A8 72.097,18.04 77.509,18.04 E1.B2 ; R1.1 77.205,19.534 77.978,18.761 E1.B2
CAN_P: E1.A6 E1.B4 IC1.17 S1.1 | length 54.1
  Top Layer w0.381: IC1.17@68.961,37.064 IC1.17 68.961,36.427 68.826,36.292 68.826,35.84 68.008,35.022 68.008,32.454 69.863,30.6 82.944,30.6 85.217,28.327 85.217,27.638 85.211,27.632 85.211,26.432 85.217,26.426 85.217,23.755 80.518,19.056 E1.B4 80.313,18.509 79.209,17.405 70.192,17.405 E1.A6 69.088,24.588 S1.1
CANGND: C5.1 C6.1 C7.1 E1.A2 E1.B8 E1.S1 E1.S2 E1.S3 FB2.1 IC1.11 IC1.13 IC1.16 IC1.18 IC1.20 S1.MH1 S1.MH2 | length 2.5
  Top Layer w0.25: C7.1@60.872,34.677 C7.1 C7.1@61.341,34.384 ; IC1.11 IC1.11@61.341,37.064 ; 63.881,37.701 63.881,37.064 IC1.13@63.899,37.046 ; IC1.18 IC1.18@70.231,37.064 ; IC1.20 IC1.20@72.771,37.064
CS_IMU: IMU1.3 MCU.26 | length 49.5
  Top Layer w0.25: IMU1.3 IMU1.3@18.488,34.75 ; v1(21.209,30.05) 21.281,29.978 36.83,29.978 53.074,46.222 MCU.26
  Bottom Layer w0.25: IMU1.3 18.288,32.971 v1(21.209,30.05)
CS_SD: MCU.25 SD1.3 | length 49.2
  Top Layer w0.25: v1(43.434,38.36) 43.526,38.36 52.574,47.408 MCU.25
  Bottom Layer w0.25: v1(43.434,38.36) 43.434,19.818 SD1.3
Enable: Bluetooth1.1 MCU.52 | length 27.2
  Top Layer w0.25: Bluetooth1.1 47.275,86.589 47.275,81.388 54.574,74.089 MCU.52
GND: Bluetooth1.5 C1.1 C2.1 C3.1 C4.1 C9.2 C12.1 C13.1 C14.1 C15.1 C16.1 C17.1 C19.1 C20.1 C22.1 C23.1 C24.1 C25.2 C26.1 C27.1 C29.1 C30.2 C31.1 D1.1 E1.A5 E1.A7 E1.B5 E1.B7 GPS1.8 GPS2.8 IC1.1 IC1.3 IC1.7 IC1.9 IC1.10 IC2.1 IC4.4 IC4.7 IC4.9 IMU1.8 IMU2.1 IMU2.8 LED1.1 MCU.12 MCU.18 MCU.31 MCU.47 MCU.63 P1.3 P2.1 P3.2 P3.16 pad.3 R4.1 RST1.1 RST1.2 SD1.8 SD2.8 SUSP1.3 SUSP2.3 USB1.5
  other v1: 15.3,6.525 41.45,6.925 21.025,16.525 52.65,34.125 6.75,40.875 33.625,40.975 36.4,50.3 65.3,50.376 54.991,57.536 92.925,59.575 31.95,62.508 66.175,67.525 72.3,71.275 63.825,73.625 15.9,76.675 37.2,81.4 56.75,82.35 83.825,84.3 8.1,84.425 20.656,84.525
GPS_RX: GPS2.4 MCU.14 | length 19.3
  Top Layer w0.25: GPS2.4 29.391,54.435 29.674,54.152 MCU.14
GPS_TX: GPS2.3 MCU.15 | length 25.5
  Top Layer w0.25: GPS2.3 27.36,56.975 26.931,56.546 26.513,56.546 25.567,55.6 25.567,53.996 26.306,53.256 28.4,53.256 28.796,53.652 MCU.15
MISO: IMU1.5 MCU.22 P3.13 SD1.5 | length 134.5
  Top Layer w0.25: IMU1.5 14.287,33.471 14.287,33.09 15.113,32.264 34.163,32.264 v1(48.514,46.615) 51.049,49.15 51.049,51.127 MCU.22
  Bottom Layer w0.25: v1(48.514,46.615) 48.514,19.818 SD1.5 56.22,17.872 56.855,17.872 59.481,20.498 59.481,26.142 73.406,40.067 73.406,53.679 77.01,57.283 P3.13
MOSI: IMU1.6 MCU.23 P3.14 SD1.6 | length 137.1
  Top Layer w0.25: IMU1.6 13.462,31.756 35.468,31.756 50.2,46.488 v1(50.292,46.488) 51.574,47.77 MCU.23
  Bottom Layer w0.25: v1(50.292,46.488) 50.292,20.58 SD1.6 53.486,17.678 54.502,17.678 59.028,22.204 59.028,26.33 72.771,40.073 72.771,54.362 76.77,58.361 78.509,58.361 79.348,57.522 79.732,57.522 P3.14
NetBluetooth1_6: Bluetooth1.6 F5.2 | length 9.1
  Top Layer w0.25: F5.2 F5.2@31.877,79.258
  Top Layer w0.5: F5.2@31.877,79.258 31.877,84.207 Bluetooth1.6
NetC8_1: C8.1 FB2.2 | length 2.6
  Top Layer w0.25: C8.1 83.895,35.781 84.074,35.602
NetC12_2: C12.2 MCU.30 | length 9.7
  Top Layer w0.25: C12.2@53,42.35 53.5,42.85 C12.2 53.575,43.796 55.074,45.295 MCU.30
NetC28_1: C28.1 C29.2 IC4.2 IC4.3 L1.2 | length 22.1
  Top Layer w0.25: C29.2 C29.2@80.847,48.266 ; L1.2 83.235,61.825 83.235,53.21 82.169,52.144 82.169,49.344 80.95,48.125 83.603,48.125 83.812,47.916 84.041,47.916 84.637,48.512 85.741,48.512 IC4.3 IC4.2 ; L1.2@84.34,62.375 L1.2@84.728,62.763
NetC28_2: C28.2 IC4.1 | length 2
  Top Layer w0.25: C28.2@83.716,49.52 IC4.1
NetC31_2: C31.2 IC4.8 | length 2.7
  Top Layer w0.25: IC4.8 90.463,48.52 C31.2@91.059,49.116 ; C31.2@91.051,49.098 C31.2@91.139,49.186
NetD1_2: D1.2 R3.2 | length 2.4
  Top Layer w0.25: R3.2@85.979,55.251 D1.2
NetF1_2: F1.2 GPS1.7 | length 8.1
  Top Layer w0.5: GPS1.7 6.964,49.279 F1.2@10.205,52.52
NetF2_2: F2.2 GPS2.7 | length 7.8
  Top Layer w0.25: F2.2@20.521,48.696 F2.2
  Top Layer w0.5: F2.2 25.24,48.95 GPS2.7
NetF3_2: F3.2 SD1.7 | length 14
  Top Layer w0.5: F3.2 48.154,14.886 SD1.7
NetF4_2: F4.2 IMU1.7 | length 13.7
  Top Layer w0.25: F4.2@16.015,24.158 F4.2@16.015,25.501
  Top Layer w0.5: IMU1.7 8.128,33.387 F4.2@16.015,25.501
NetF6_1: F6.1 R7.1 | length 17.3
  Top Layer w0.25: F6.1 F6.1@88.946,40.646 ; R7.1@90.181,52.79 R7.1
  Top Layer w0.5: F6.1@88.946,40.646 93.7,45.4 93.7,51.125 92.035,52.79 R7.1@90.181,52.79
NetIC3_60: MCU.60 R5.1 | length 9.2
  Top Layer w0.25: MCU.60 50.549,62.677 50.549,63.636 52.324,65.411 52.324,70.968 R5.1
NetIC4_6: IC4.6 R8.2 | length 2.4
  Top Layer w0.25: IC4.6 88.774,47.495 88.774,45.482 R8.2
NetIC4_10: IC4.10 R7.2 | length 3.6
  Top Layer w0.25: R7.2 88.724,52.622 88.724,49.545 IC4.10
NetLED1_2: LED1.2 R2.1 | length 2.3
  Top Layer w0.381: R2.1 72.903,51.666 LED1.2@73.025,51.544
NetLED2_1: LED2.1 R4.2 | length 3.8
  Top Layer w0.25: LED2.1@51.759,84.358 55.392,84.358 R4.2
NetR1_2: R1.2 S1.3 | length 21.9
  Top Layer w0.25: S1.3 62.25,24.6 64.025,26.375 76.65,26.375 77.8,25.225 77.8,23.103 79.005,21.898 R1.2
NRST: C17.2 MCU.7 P1.5 RST1.3 RST1.4 | length 54.1
  Top Layer w0.25: C17.2 36.981,65.677 ; RST1.3 RST1.4 36.981,65.677 ; MCU.7 46.549,57.677 45.823,57.677 43.169,60.331 42.47,60.331 v1(41.767,61.034) 41.624,61.034 36.981,65.677
  Bottom Layer w0.25: v1(41.767,61.034) 47.82,61.034 P1.5
PA4: MCU.20 P3.8 | length 37.2
  Top Layer w0.25: MCU.20 v1(50.074,53.854)
  Bottom Layer w0.25: v1(50.074,53.854) 65.024,53.854 74.803,63.633 78.701,63.633 P3.8
PA8: MCU.41 P3.5 | length 23.6
  Top Layer w0.25: MCU.41 65.237,57.152 75.401,67.316 77.304,67.316 P3.5
PA9: MCU.42 P3.4 | length 27
  Top Layer w0.25: MCU.42 64.631,57.652 75.669,68.69 78.678,68.69 P3.4
PA10: MCU.43 P3.3 | length 24.3
  Top Layer w0.25: MCU.43 64.115,58.152 75.819,69.856 77.304,69.856 P3.3
PB6: MCU.58 P3.7 | length 35.5
  Top Layer w0.25: v1(51.574,59.442) MCU.58
  Bottom Layer w0.25: v1(51.574,59.442) 51.574,57.144 52.728,55.99 66.065,55.99 74.851,64.776 77.304,64.776 P3.7
PC6: MCU.37 P3.11 | length 21.3
  Top Layer w0.25: MCU.37 70.792,55.152 75.336,59.696 77.304,59.696 P3.11
PC7: MCU.38 P3.10 | length 24.7
  Top Layer w0.25: MCU.38 69.994,55.652 75.627,61.285 78.893,61.285 P3.10
PC8: MCU.39 P3.9 | length 21.9
  Top Layer w0.25: MCU.39 69.035,56.152 75.119,62.236 77.304,62.236 P3.9
PC9: MCU.40 P3.6 | length 26.4
  Top Layer w0.25: MCU.40 65.917,56.652 75.415,66.15 78.678,66.15 P3.6
SCLK: IMU1.4 MCU.21 P3.12 SD1.4 | length 142
  Top Layer w0.25: IMU1.4 17.465,32.833 32.959,32.833 45.72,45.594 v1@46.736,46.61 ; v1(46.736,46.869) v1@46.736,46.61 ; MCU.21 50.549,51.127 50.549,50.423 v1@46.736,46.61
  Bottom Layer w0.25: v1(46.736,46.869) 46.736,19.056 SD1.4 60.036,19.148 60.036,25.861 73.933,39.758 73.933,52.77 77.228,56.065 80.278,56.065 81.049,56.836 81.049,58.745 P3.12
State: Bluetooth1.2 LED2.2 | length 8.6
  Top Layer w0.25: Bluetooth1.2 46.355,88.525 50.517,88.525 51.709,87.333 LED2.2
SUSP1: MCU.27 SUSP1.2 | length 60.3
  Top Layer w0.25: v1(33.909,27.946) 35.976,27.946 53.574,45.544 MCU.27
  Bottom Layer w0.25: SUSP1.2 19.912,23.12 24.738,27.946 v1(33.909,27.946)
SUSP2: MCU.9 SUSP2.2 | length 45.8
  Top Layer w0.25: v1(32.244,59.225) 41.854,59.225 44.427,56.652 MCU.9
  Bottom Layer w0.25: SUSP2.2 16.835,74.634 v1(32.244,59.225)
SWO: MCU.55 P1.6 | length 26.3
  Top Layer w0.25: MCU.55 53.099,62.627 53.099,61.923 53.548,61.474 56.904,61.474 57.277,61.847 57.277,62.744 57.531,62.998 57.531,64.649 63.691,70.808 65.215,70.808 67.183,72.777 P1.6
TCK: MCU.49 P1.2 | length 15.6
  Top Layer w0.25: MCU.49 56.074,63.102 57.023,64.051 P1.2
TMS: MCU.46 P1.4 | length 34.8
  Top Layer w0.25: MCU.46 58.099,59.677 64.497,59.677 68.714,63.894 68.714,78.491 67.57,79.635 64.896,79.635 63.228,77.967 62.213,77.967 P1.4
"USER LED": MCU.36 R2.2 | length 13.4
  Top Layer w0.25: MCU.36 69.56,54.652 70.062,54.15 70.728,54.15 71.103,53.775 R2.2
VCC: C3.2 C4.2 C27.2 C30.1 F2.1 F5.1 IC1.8 IC2.4 IC4.5 L1.1 P3.1 R3.1 R8.1 USB1.1 | length 192
  Top Layer w0.25: IC4.5@85.774,47.52 85.95,47.344 85.95,46.7 86.325,46.325
  Top Layer w0.5: F2.1 20.775,61.756 31.471,72.452 F5.1 31.471,73.652 27.95,77.173 27.95,89.25 29.1,90.4 58.575,90.4 73.144,75.831 77.431,75.831 ; IC1.8 63.881,44.202 64.983,43.1 74.844,43.1 75.897,44.153 ; C3.2 75.858,47.377 C4.2 ; 75.897,46.107 75.897,44.153 ; P3.1 77.431,75.831 ; v1(82.6,44.793) 80.982,43.175 ; R3.1@84.179,55.251 84.179,56.869 84.86,57.55 84.86,57.664 C27.2 85.274,58.039 85.274,58.572 88.912,62.209 L1.1 88.912,63.095 90.308,64.491 91.881,64.491 C30.1 C30.1@92.306,64.991 ; v1(84.425,52.25) 84.425,55.133 R3.1 ; 86.325,46.325 86.325,46.306 87.238,45.393 R8.1 87.238,45.043 86.988,44.793 86.813,44.793 85.195,43.175 80.982,43.175 ; USB1.1@87.298,78.586 88.171,78.586 90.721,76.036 90.721,71.672 IC2.4@90.758,71.634 ; USB1.1 80.184,78.584 77.431,75.831 ; L1.1@88.9,63.579 88.9,70.618 89.916,71.634 IC2.4@90.758,71.634 ; IC2.4 IC2.4@90.758,71.634 ; 75.897,44.153 76.875,43.175 80.982,43.175
  Bottom Layer w0.5: v1(82.6,44.793) 82.6,49.075 84.425,50.9 v1(84.425,52.25)
VIO: C1.2 C2.2 C9.1 C13.2 C14.2 C15.2 C16.2 C19.2 C20.2 C22.2 C23.2 C24.2 C25.1 C26.2 F1.1 F3.1 F4.1 IC1.6 IC2.6 IC2.7 MCU.1 MCU.13 MCU.19 MCU.32 MCU.48 MCU.64 P1.1 P2.3 P3.15 SUSP1.1 SUSP2.1 | length 325.9
  Top Layer w0.25: C25.1 39.325,55.6 C9.1 42.818,55.6 43.766,54.652 MCU.13 48.727,54.652 48.75,54.675 ; 46.574,61.601 MCU.1 48.574,60.652 ; 48.574,64.996 MCU.64 48.574,60.652 ; 48.641,49.515 49.574,50.448 MCU.19 49.574,52.411 49.147,52.838 ; 48.768,60.458 48.574,60.652 ; C13.2@56.074,49.609 MCU.32 56.074,52.136 ; 56.121,60.627 MCU.48@57.908,60.627 ; MCU.48 60.19,60.652
  Top Layer w0.5: SUSP1.1 19.098,20.12 21.971,22.993 21.971,25.194 F4.1 31.24,25.914 34.069,23.086 39.718,23.086 F3.1@41.518,21.286 ; SUSP2.1 9.116,71.634 15.075,65.675 15.075,49.625 F1.1@11.617,46.167 ; F1.1 11.05,45.6 F1.1@11.617,46.167 ; F1.1@11.525,46.258 F1.1@11.617,46.167 ; F3.1 F3.1@41.518,21.286 ; v1(41.529,28.962) 41.529,21.297 F3.1@41.518,21.286 ; C16.2@42.316,47.81 42.676,48.17 C15.2 47.296,48.17 48.641,49.515 ; C16.2 36.997,47.797 29.65,40.45 15.175,40.45 11.617,44.008 F1.1@11.617,46.167 ; C22.2@43.815,63.291 45.614,63.291 46.574,62.331 46.574,61.601 ; C22.2@44.248,63.672 C22.2 44.182,63.813 42.873,63.813 42.037,64.649 42.037,72.142 P2.3 ; C19.2@47.423,66.124 C19.2 ; C19.2@47.498,65.997 47.573,65.997 48.574,64.996 49.663,66.085 C20.2 ; 48.768,60.458 49.784,59.442 v1(49.784,57.536) ; 49.147,52.838 48.75,53.235 48.75,54.675 48.75,56.475 49.635,57.36 50.85,57.36 ; P1.1@54.18,78.16 P1.1 ; C13.2@56.074,49.609 56.694,48.989 C13.2 58.9,48.989 ; 56.074,52.136 50.85,57.36 ; 56.121,60.627 53.086,57.592 51.082,57.592 50.85,57.36 ; C2.2 56.5,43.275 57.575,44.35 58.775,44.35 C1.2 58.9,48.989 ; C14.2 58.775,49.269 58.9,49.144 ; 60.19,60.652 60.885,61.347 C23.2 63.368,61.347 C24.2 ; IC1.6@66.421,46.488 66.421,47.454 65.1,48.775 59.269,48.775 58.9,49.144 ; P3.15 78.634,55.946 80.336,55.946 81.605,57.215 81.605,66.498 84.201,69.094 IC2.7 IC2.6 84.936,70.364 82.931,72.369 v1(82.931,73.031) 83.053,73.153 83.053,75.128 C26.2 ; 58.9,48.989 58.9,49.144
  Bottom Layer w0.5: v1(41.529,28.962) 41.529,49.281 v1(49.784,57.536) ; P2.3@44.704,74.555 44.958,74.301 50.927,74.301 P1.1 57.15,80.524 77.724,80.524 82.931,75.317 v1(82.931,73.031)
VISOIN: C5.2 C6.2 C8.2 FB1.2 IC1.19 | length 16.3
  Top Layer w0.25: C5.2 70.867,34.13 71.367,34.63 71.367,36.549 IC1.19 71.501,36.046 72.704,34.843 72.704,34.503 73.204,34.003 C6.2 75.21,34.003 76.229,35.022 FB1.2 76.679,35.022 77.698,34.003 81.456,34.003 C8.2 ; C5.2@71.12,34.13 C5.2@71.239,34.011 ; IC1.19@71.501,37.064 71.501,37.701
VISOOUT: C7.2 FB1.1 IC1.12 | length 19.4
  Top Layer w0.25: C7.2@62.453,33.796 C7.2 62.611,34.638 IC1.12 62.611,37.32 64.389,39.098 74.002,39.098 76.229,36.872 FB1.1
pads on no net: E1.A4 E1.B6 E1.MH1 E1.MH2 GPS1.1 GPS1.2 GPS1.3 GPS1.4 GPS1.5 GPS1.6 GPS2.1 GPS2.2 GPS2.5 GPS2.6 IC1.2 IC1.14 IC2.2 IC2.3 IC2.5 IC2.8 IC4.11 IMU1.1 IMU1.2 IMU2.2 IMU2.3 IMU2.4 IMU2.5 IMU2.6 IMU2.7 MCU.2 MCU.3 MCU.4 MCU.5 MCU.6 MCU.8 MCU.10 MCU.11 MCU.16 MCU.17 MCU.24 MCU.28 MCU.29 MCU.35 MCU.44 MCU.45 MCU.50 MCU.51 MCU.56 MCU.57 MCU.59 MCU.61 MCU.62 S1.2 SD1.1 SD1.2 SD2.1 SD2.2 SD2.3 SD2.4 SD2.5 SD2.6 SD2.7 SUSP1.MH1 SUSP2.MH1 USB1. USB1.2 USB1.3 USB1.4

## Polygon pours and split planes (outlines as drawn)
GND on Top Layer "Top Layer-GND" (solid, pour order 8): 55.975,40.864 55.975,-3.296 -10.287,-3.296 -10.287,104.146 -7.493,106.94 116.332,106.94 116.332,53.6 103.468,40.736
CANGND on Top Layer "CANGND_L01_P005" (solid, pour order 5): 91.567,-6.852 91.567,4.705 99.568,4.705 99.568,40.773 56.25,40.903 56.25,-3.92 59.182,-6.852
GND on Bottom Layer "Bottom Layer-GND" (solid, pour order 6): -4.445,101.479 -3.302,100.336 100.33,100.336 100.33,-8.122 96.774,-4.566 -5.588,-4.566

## Silkscreen, mask and mechanical layers (free items; w line width, h text height)
Top Overlay:
  drawing of 6 lines, arcs and shapes, not listed

## Text inside footprints (layer, text, board x,y; h text height)
P3: Top Overlay "2" at 79.463,75.063 h1 r270; Top Overlay "1" at 76.923,75.063 h1 r270; Top Overlay "15" at 76.845,52.95 h1 r270; Top Overlay "16" at 79.625,52.965 h1 r270